# Altium PCB CH549EVT_Core_Pac_L@1809.PcbDoc
Units mil, origin at the board's own origin, x right, y up, seen from the top; angles counter-clockwise.
Board outline 1790.5 x 2155.84 mil, 2 copper layers (Top Layer, Bottom Layer); 16 components, 51 nets, 142 pads, 73 vias.
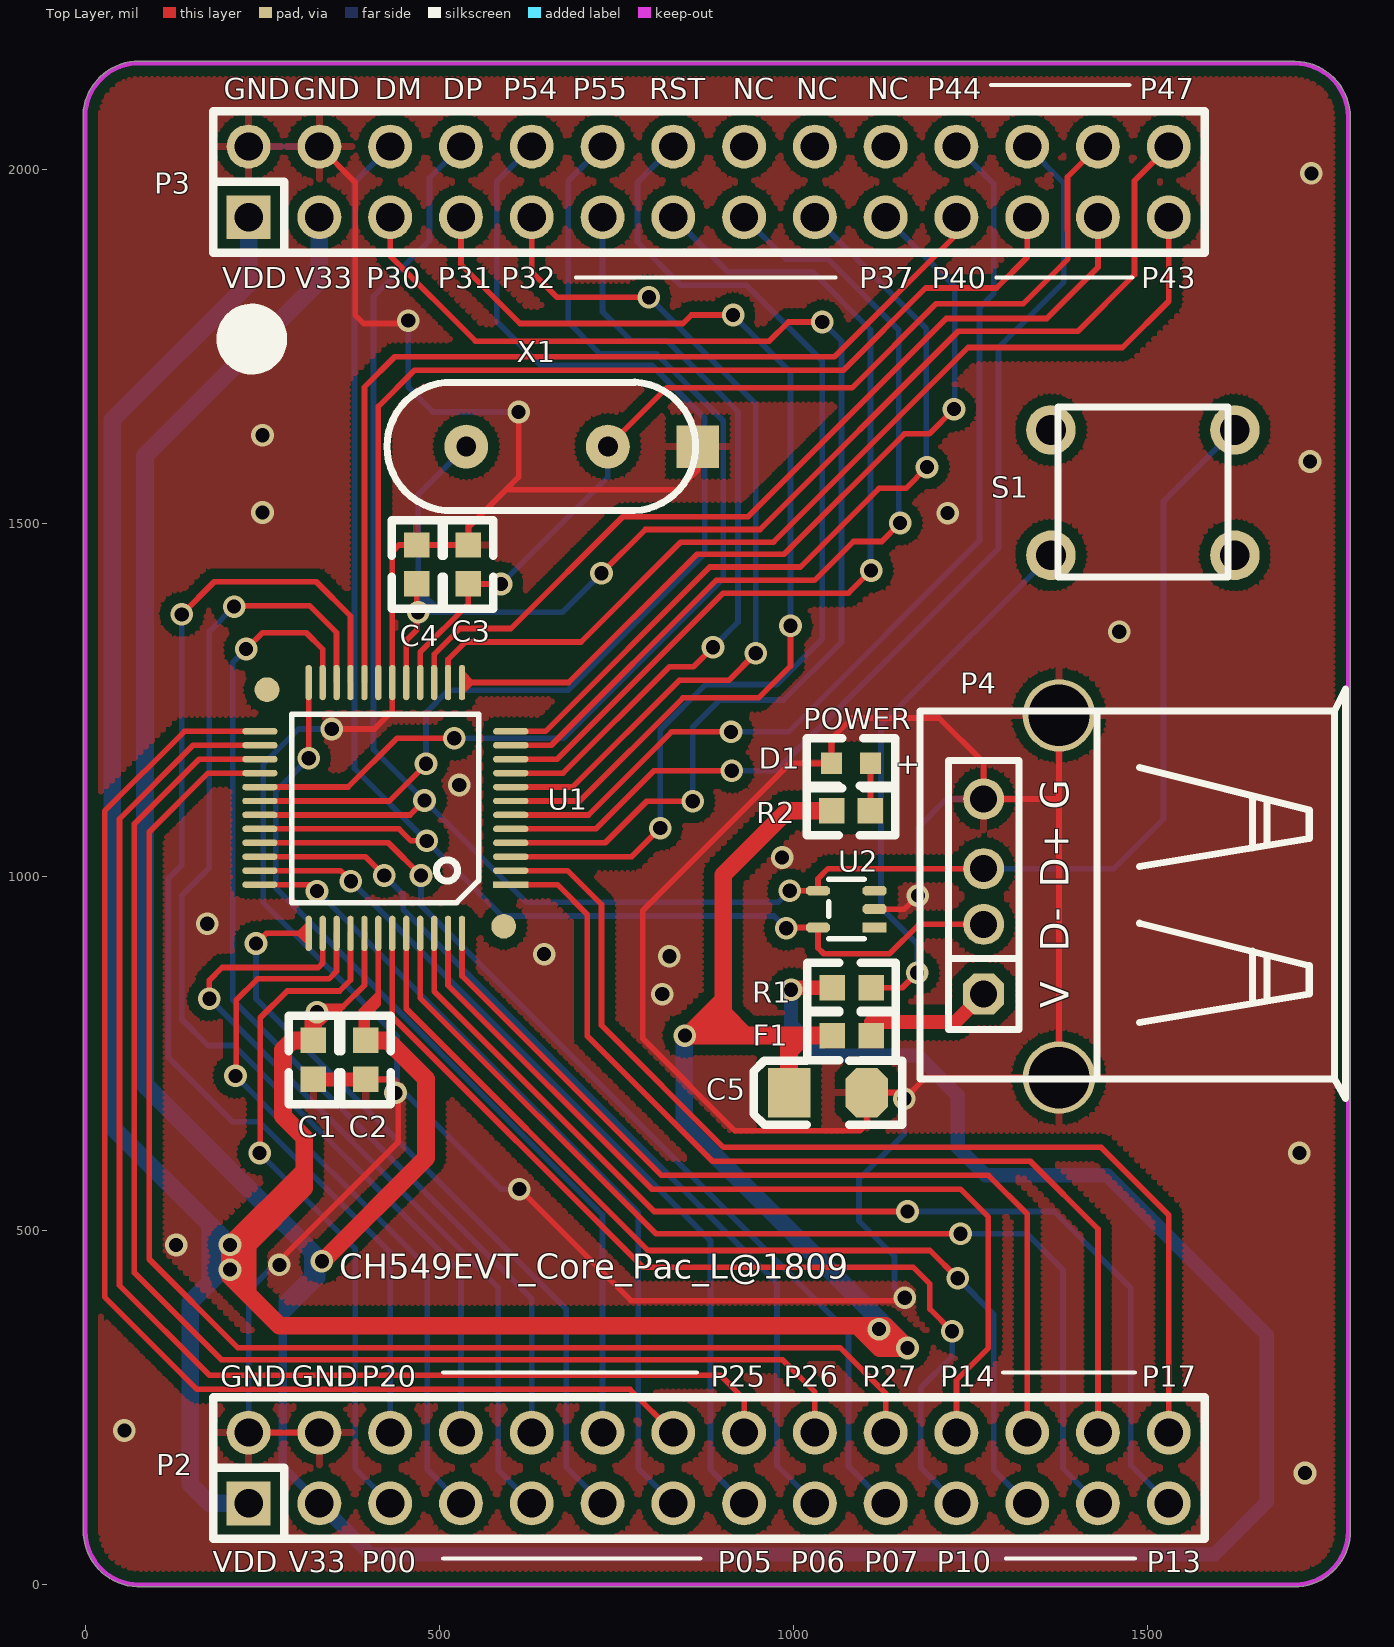
[diagram p0: Top Layer view]
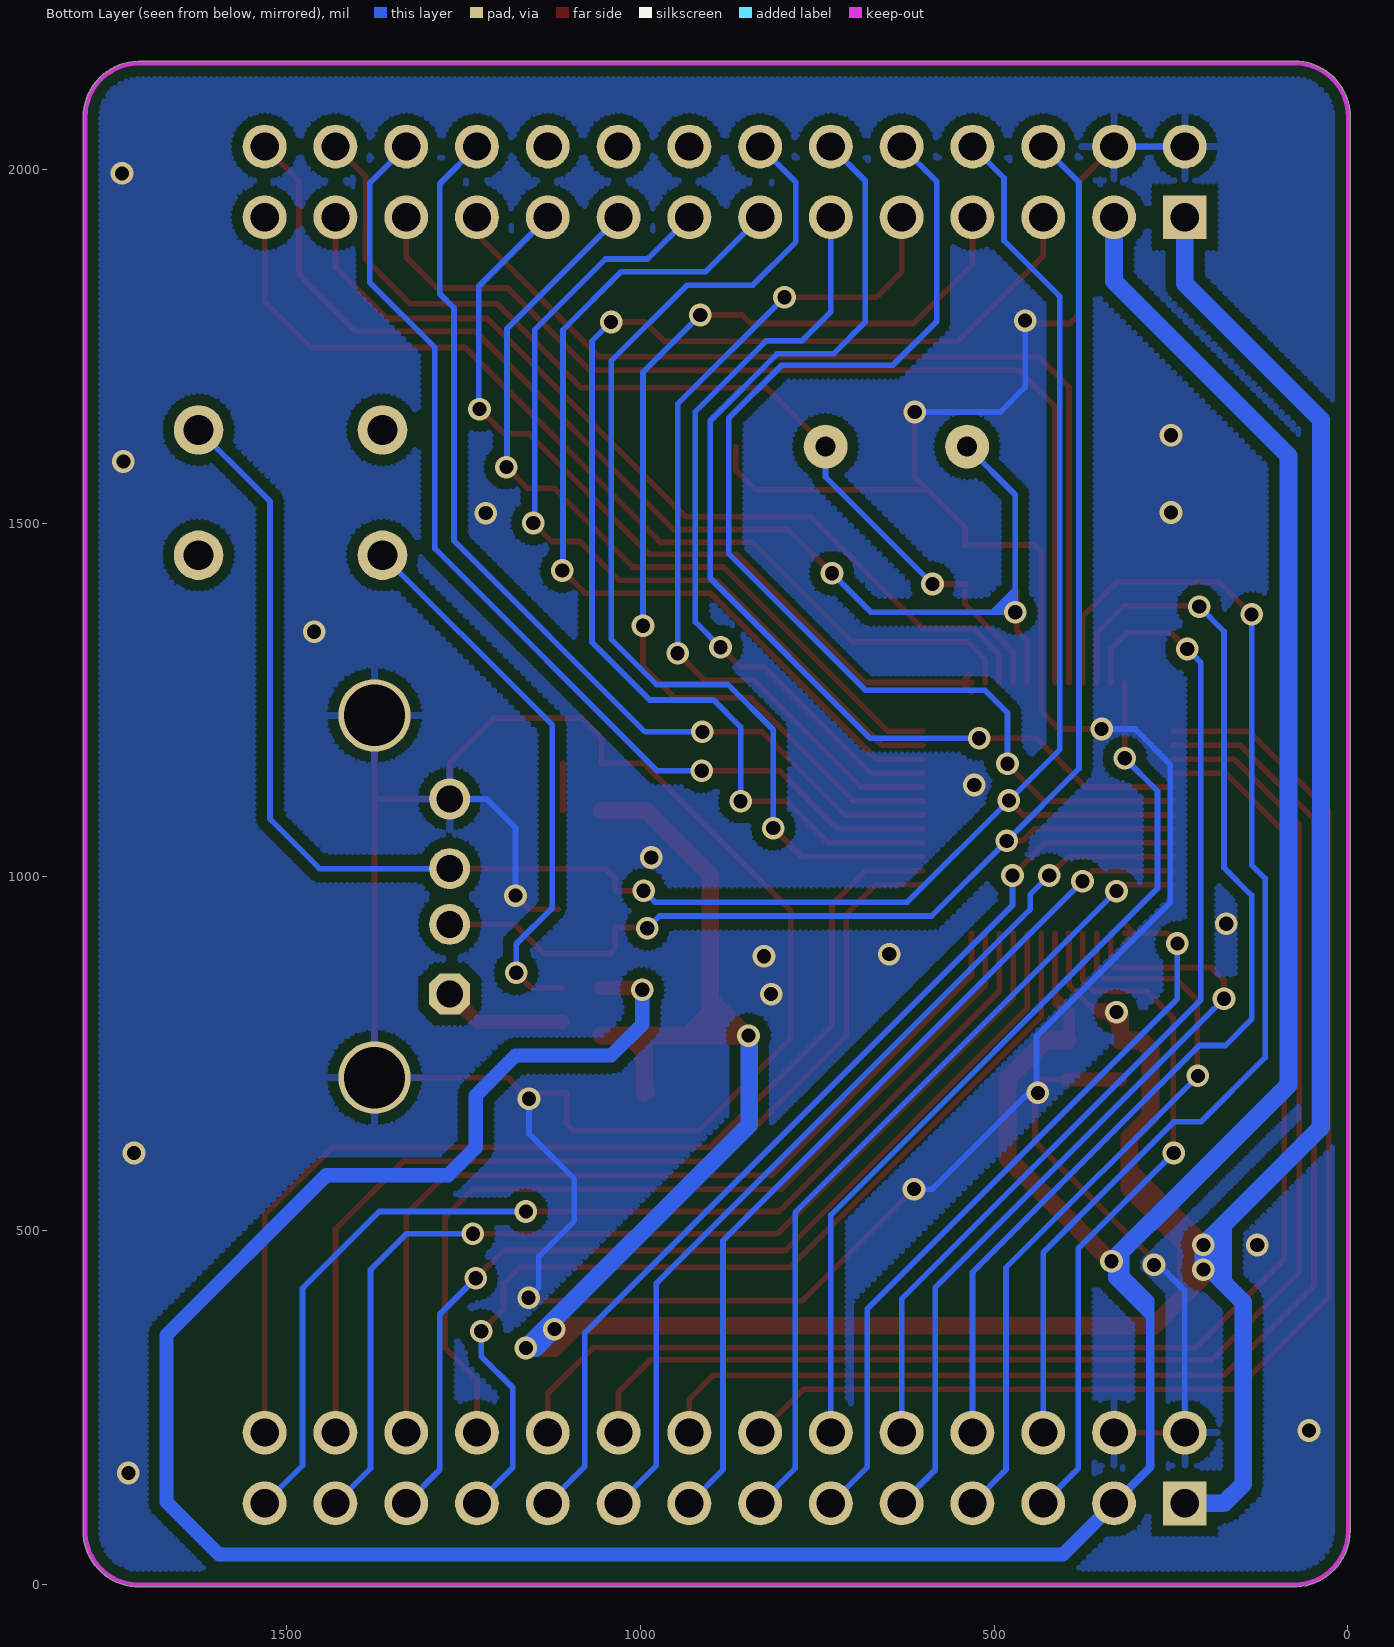
[diagram p1: Bottom Layer view, seen from below]

## Layer stack, top to bottom
Top Layer: signal copper 1.4
Dielectric: dielectric 12.6, FR-4, Dk 4.8
Bottom Layer: signal copper 1.4

## Board outline
-2.94,76.96 -2.94,2071.81 cw(c-0.36,2073.38) -3.37,2073.38 cw(c76,2073.38) -2.94,2081.67 -2.94,2082 cw(c0.08,2082) -2.8,2082.91 cw(c76,2073.38) 76,2152.75 1707.6,2152.75 cw(c1707.6,2149.73) 1708.82,2152.49 cw(c1707.64,2073.13) 1786.67,2080.49 cw(c1784.08,2078.96) 1787.09,2078.96 1787.09,76.74 cw(c1784.11,76.28) 1787.13,76.28 cw(c1707.76,76.28) 1707.76,-3.09 cw(c1707.76,-0.08) 1707.03,-3 cw(c1706.77,0) 1706.77,-3.01 77.04,-3.01 cw(c76.36,-0.08) 76.36,-3.09 cw(c76.36,76.28) 72.78,-3.01 cw(c76.36,76.28) -3.02,76.28 cw(c0,76.28)

## Design rules (kind name [scope] priority, off if disabled: settings)
Clearance Clearance_1 [InPoly] p1: gap=15
Clearance [All] p2: gap=8
ComponentClearance [All] p1: gap=0 collisioncheckmode=3 verticalgap=10 showdistances=FALSE
MinimumSolderMaskSliver [All] p1 off: minsoldermaskwidth=10
PolygonConnect [IsVia] p1: connectstyle=Direct reliefconductorwidth=10 reliefentries=4 polygonreliefangle="90 Angle"
RoutingVias [All] p1: holewidth=12 width=24 viastyle="Through Hole" minholewidth=12 minwidth=24 maxholewidth=28 maxwidth=50
SilkToSilkClearance [All] p1 off: silktosilkclearance=10
SilkscreenOverComponentPads SilkToSolderMaskClearance [IsPad] p1 off: minsilkscreentomaskgap=10
SolderMaskExpansion [All] p1: expansion=4
Width [All] p1: maxlimit=30 minlimit=8 preferedwidth=10
24 further rules are at their usual default settings.

## Classes and differential pairs
component class CH549EVT_Core_Pac_L: C1 C2 C3 C4 D1 F1 P2 P3 P4 R1 R2 U1 U2 X1

## Components (designator, comment, footprint, x,y, rotation, side; value= is the part's Value field where it differs from the comment)
C1 "Cap" 0603 322.08,714 r90 top
C2 "Cap" 0603 396.08,714 r90 top
C3 "(NC 15p)" 0603 541.08,1414 r90 top
C4 "(NC 15p)" 0603 468.11,1414 r90 top
C5 "Cap" 3216 994.08,695.25 r180 top
D1 "LED3" 0603L 1109.08,1160.64 r180 top
F1 "500mA" 0603 1055.08,775.9 r0 top
P2 "Header 14X2" IDC28 230.56,115 r90 top (schematic designator P14)
P3 "Header 14X2" IDC28 230.56,1932 r90 top (schematic designator P15)
P4 "USB" USBA-L 1269.08,834.64 r90 top
R1 "4.7K" 0603 1055.08,843.57 r0 top
R2 "Res2" 0603 1054.08,1093.64 r0 top
S1 "SW-PB" keyx 1623.92,1631.63 r270 top (schematic designator S2)
U1 "CH549L" LQFP48 600.88,989.21 r90 top locked
U2 "CH412Z" SOT353 1115.08,928.57 r90 top
X1 "(NC 24MHz)" XTAL62/28 738.08,1608 r90 top

## Footprints (in the part's own frame and the unit in brackets; to place one, negate y for a bottom-side part, rotate by r counter-clockwise, add the part's x,y. Pads: shape width x height; smd on the part's side, far side on the other; paste and mask are expansions set on the pad)
0603 [mil]
  rect 36x36 smd: 1(0,0) 2(55,0)
  silkscreen extent -35,-35 90,35
0603L [mil]
  rect 30x30 smd: 1(0,0) 2(55,0)
  silkscreen extent -35,-35 90,35
3216 [mil]
  rect 60x70 smd: 1(0,0)
  oct 60x70 smd: 2(-110,0)
  silkscreen extent -160,-45 50,45
IDC28 [mil]
  rect 62x62 hole 40: 1(0,0)
  round 62 hole 40: 2(100,0) 3(0,-100) 4(100,-100) 5(0,-200) 6(100,-200) 7(0,-300) 8(100,-300) 9(0,-400) 10(100,-400) 11(0,-500) 12(100,-500) 13(0,-600) 14(100,-600) 15(0,-700) 16(100,-700) 17(0,-800) 18(100,-800) 19(0,-900) 20(100,-900) 21(0,-1000) 22(100,-1000) 23(0,-1100) 24(100,-1100) 25(0,-1200) 26(100,-1200) 27(0,-1300) 28(100,-1300)
  silkscreen extent -50,-1351 150,50
keyx [mil]
  round 70 hole 42: 1(0,0) 2(0,-259.84) 3(177.17,-259.84) 4(177.17,0)
  silkscreen extent -32,-250 208,-10
LQFP48 [mm]
  round 0.889 smd: 0(-1.496,0.254) 0(6.996,8.746)
  rect 0.229x1.27 smd: 1(0,0)
  oval 0.229x1.27 smd: 2(0.5,0) 3(1,0) 4(1.5,0) 5(2,0) 6(2.5,0) 7(3,0) 8(3.5,0) 9(4,0) 10(4.5,0) 11(5,0) 12(5.5,0) 25(5.5,9) 26(5,9) 27(4.5,9) 28(4,9) 29(3.5,9) 30(3,9) 31(2.5,9) 32(2,9) 33(1.5,9) 34(1,9) 35(0.5,9) 36(0,9)
  oval 1.27x0.229 smd: 13(7.25,1.75) 14(7.25,2.25) 15(7.25,2.75) 16(7.25,3.25) 17(7.25,3.75) 18(7.25,4.25) 19(7.25,4.75) 20(7.25,5.25) 21(7.25,5.75) 22(7.25,6.25) 23(7.25,6.75) 24(7.25,7.25) 37(-1.75,7.25) 38(-1.75,6.75) 39(-1.75,6.25) 40(-1.75,5.75) 41(-1.75,5.25) 42(-1.75,4.75) 43(-1.75,4.25) 44(-1.75,3.75) 45(-1.75,3.25) 46(-1.75,2.75) 47(-1.75,2.25) 48(-1.75,1.75)
  silkscreen extent -0.65,1.15 6.11,7.86
SOT353 [mil]
  rect 14x34 smd: 1(0,0)
  oct 14x34 smd: 2(26,0) 3(52,0) 4(52,80) 5(0,80)
  silkscreen extent -16,15 68,65
USBA-L [mm]
  oct 1.473x1.473 hole 0.965: 1(0,0)
  round 1.473 hole 0.965: 2(2.5,0) 3(4.5,0) 4(7,0)
  round 2.6 hole 2.2: 5(-3,-2.7) 6(10,-2.7)
  silkscreen extent -3.75,-12.99 10.95,2.29
XTAL62/28 [mil]
  rect 60x60 smd: 0(0,-127)
  round 62 hole 28: 1(0,0) 2(0,200)
  silkscreen extent -91,-124 91,312

## Part data
C1 C2 C5: "Capacitor"
C3 C4: library part Pro1BB.tmp_20p_7
D1: "Typical BLUE SiC LED"
F1: library part "Fuse 1", "Fuse"
P2 P3: "Header, 14-Pin, Dual row"
P4: "USB Port"
R1: library part Res2, "Resistor"
R2: "Resistor"
S1: "Switch"
U1: "8bit MCS51 MCU with ADC & USB type-C host & device & quad UART & SPI"
U2: "Quad ESD protect, low speed"
X1: library part Pro1BB.tmp_12MHz_6

## Via types
v1: diameter 32, hole 20, Top Layer to Bottom Layer, tented both sides, 73 vias

## Nets (pads, with @x,y where several pads share a name; then routed paths per layer and width w, separated by ;. In a path a pad name is that pad's centre, name@x,y a point inside that pad or via, vN(x,y) a via of type N, cw(c..) or ccw(c..) an arc to the next point about the centre after c; other vN are vias at no path point)
DM: P3.6 P4.2 U1.32 U2.5 | length 2174.8
  Top Layer w8: U1.32 443.13,1067.95 460.08,1051 v1(482.13,1051) ; v1(990.08,927.57) 991.08,928.57 U2.5 1035.08,899.57 1043.08,891.57 1136.08,891.57 1177.57,933.06 P4.2
  Bottom Layer w8: P3.6 380.08,1981.52 380.08,1153.05 v1(482.13,1051) 588.36,944.76 972.89,944.76 v1(990.08,927.57)
DP: P3.8 P4.3 S1.1 U1.31 U2.4 | length 3021.7
  Top Layer w8: U1.31 458.72,1087.64 v1@475.08,1104 ; v1(995.08,980.57) U2.4 1035.08,997.57 1049.31,1011.8 P4.3
  Bottom Layer w8: P3.8 486.08,1987.52 486.08,1899 407.08,1820 407.08,1180 v1(479.08,1108) 622.63,964.45 978.95,964.45 v1(995.08,980.57) ; P4.3 1452.94,1011.8 1523.08,1081.94 1523.08,1530.79 S1.1@1643.61,1651.31
GND: C1.1 C2.1 C3.2 C4.2 C5.2 D1.2 P2.2 P2.4 P3.2 P3.4 P4.4 P4.5 P4.6 U1.18 U2.2 X1.0 | length 6788.2
  Top Layer w8: P2.2 P2.4 ; v1@271.08,456 272.08,456 442.08,626 442.08,704 432.08,714 C2.1 ; P3.4 381.08,1981.48 381.08,1794 393.08,1782 v1@467.08,1782 ; v1@351.08,1209 408.08,1209 433.56,1234.48 U1.18 433.56,1459.48 443.08,1469 C4.2 C3.2 541.08,1494 594.08,1547 ; v1(612.08,1657) 612.08,1565 594.08,1547 ; v1(613.08,559) 770.62,401.46 1141.81,401.46 v1@1157.56,417.2 ; X1.0 865.08,1575 837.08,1547 594.08,1547 ; U2.2 1157.08,954.57 v1(1176.08,973.57) ; P4.6 1375.38,1110.12 ; 1375.38,1110.12 1375.27,1110.23 P4.4 1269.08,1161.57 1206.08,1224.57 1083.08,1224.57 1054.08,1195.57 D1.2 995.48,1160.64 787.48,952.64 787.48,771.54 917.76,641.25 1094.2,641.25 1104.08,651.13 C5.2 1148.4,695.25 v1(1157.08,686.57) 1187.03,716.53 P4.5 1375.38,1110.12
  Top Layer w20: C1.1 C2.1
  Bottom Layer w8: P2.2 230.56,415.48 v1@271.08,456 ; P3.2 P3.4 ; v1@351.08,1209 301.08,1209 251.08,1159 251.08,964 440.08,775 v1@440.08,702 ; v1@442.08,704 587.08,559 v1(613.08,559) ; v1(456.08,1786) 456.08,1692 491.08,1657 v1(612.08,1657) ; v1(1157.08,686.57) 1157.08,637.2 1093.01,573.13 1093.01,514.07 1143.08,464 1143.08,419.87 v1(1157.56,405.39) ; v1(1176.08,973.57) 1176.08,1069.57 1216.73,1110.23 P4.4
  other v1: 1723.08,158 55.08,218 274.08,452 128.08,480 1715.08,610 438.08,695 815.04,834.53 825.08,888 648.08,891 172.08,934 984.33,1027.44 528.08,1130 348.08,1209 1460.71,1346.34 1218.08,1514 250.08,1515 1730.08,1587 250.08,1624 1732.08,1994
NetD1_1: D1.1 R2.2 | length 67
  Top Layer w8: R2.2 D1.1
NetF1_2: F1.2 P4.1 | length 175.8
  Top Layer w20: 1110.34,794.64 1110.08,794.9 1229.34,794.9 P4.1
NetP1_2: R1.2 S1.3 | length 812
  Top Layer w8: R1.2 1154.08,843.57 v1(1175.08,864.57)
  Bottom Layer w8: v1(1175.08,864.57) 1175.08,905.57 1124.08,956.57 1124.08,1214.46 S1.3@1383.76,1474.15
P00: P2.5 U1.40 | length 978.3
  Top Layer w8: v1(246.08,610) 247.08,611 247.08,801 285.08,839 359.08,839 374.5,854.43 U1.40
  Bottom Layer w8: v1(246.08,610) 381.08,475 381.08,164.48 P2.5
P01: P2.7 U1.39 | length 1055.1
  Top Layer w8: v1@213.08,719 213.08,826 243.08,856 344.08,856 354.82,866.74 U1.39
  Bottom Layer w8: v1(212.08,719) 483.08,448 483.08,162.48 P2.7
P02: P2.9 U1.38 | length 1139.9
  Top Layer w8: v1(175.08,828) 175.08,843 175.08,854 193.08,872 204.08,872 329.08,872 335.13,878.06 U1.38
  Bottom Layer w8: v1(175.08,828) 583.08,420 583.08,162.48 P2.9
P03: P2.11 U1.37 | length 1109.4
  Top Layer w8: v1(241.08,906) 255.39,920.31 284.08,920.31 302.08,920.31 ; U1.37@313.92,932.16 302.08,920.31 ; U1.37@315.24,907.16 302.08,920.31 ; U1.37 302.08,920.31
  Bottom Layer w8: v1(241.08,906) 241.08,828 679.08,390 679.08,166.48 P2.11
P04: P2.13 U1.36 | length 1157.9
  Top Layer w8: U1.36 317.87,989.21 v1(327.08,980)
  Bottom Layer w8: v1(327.08,980) 781.08,526 781.08,508 781.08,164.48 P2.13
P05: P2.15 U1.35 | length 1243.8
  Top Layer w8: U1.35 360.18,1008.9 v1(375.08,994)
  Bottom Layer w8: v1(375.08,994) 883.08,486 883.08,478 883.08,162.48 P2.15
P06: P2.17 U1.34 | length 1351.5
  Top Layer w8: U1.34 395.5,1028.58 v1(422.08,1002)
  Bottom Layer w8: v1@410.08,1005 422.08,993 v1(422.08,1002) 449.08,975 449.08,954 977.08,426 977.08,168.48 P2.17
P07: P2.19 U1.33 | length 1405.6
  Top Layer w8: U1.33 427.81,1048.27 v1(474.08,1002)
  Bottom Layer w8: v1(474.08,1002) 474.08,960 1078.08,356 1078.08,167.48 P2.19
P10: P2.21 U1.43 | length 1396
  Top Layer w8: U1.43 433.56,802.52 787.38,448.7 1169.37,448.7 1192.99,425.08 1192.99,389.65 v1(1224.49,358.15)
  Bottom Layer w8: v1(1224.49,358.15) 1224.49,322.72 1180.08,278.31 1180.08,165.48 P2.21
P11: P2.23 U1.44 | length 1402
  Top Layer w8: U1.44 453.24,813.83 794.76,472.32 1192.99,472.32 v1(1232.36,432.95)
  Bottom Layer w8: v1(1232.36,432.95) 1283.08,382.24 1283.08,162.48 P2.23
P12: P2.25 U1.45 | length 1520.7
  Top Layer w8: U1.45 472.93,829.15 806.13,495.94 v1(1236.3,495.94)
  Bottom Layer w8: v1@1224.49,495.94 v1(1236.3,495.94) 1330.13,495.94 1381.08,445 1381.08,164.48 P2.25
P13: P2.27 U1.46 | length 1566.2
  Top Layer w8: U1.46 492.61,838.46 803.64,527.44 v1(1161.5,527.44)
  Bottom Layer w8: v1(1161.5,527.44) 1368.64,527.44 1477.08,419 1477.08,168.48 P2.27
P14: P2.22 U1.47 | length 1295.7
  Top Layer w8: U1.47 512.3,846.78 800.14,558.94 1236.3,558.94 1275.67,519.57 1275.67,334.53 1230.56,289.42 P2.22
P15: P2.24 U1.48 | length 1306.9
  Top Layer w8: U1.48 531.98,860.09 813.71,578.37 1275.92,578.37 1330.56,523.73 P2.24
P16: P2.26 U1.1 | length 1419.5
  Top Layer w8: U1.1 666.87,989.21 709.08,947 709.08,775.13 885.9,598.31 1334.77,598.31 1430.56,502.52 P2.26
P17: P2.28 U1.2 | length 1538.5
  Top Layer w8: U1.2 681.18,1008.9 729.08,961 729.08,790.57 901.65,617.99 1435.09,617.99 1530.56,522.52 P2.28
P20: P2.6 U1.21 | length 1687.4
  Top Layer w8: v1(136.08,1371) 182.08,1417 326.08,1417 374.5,1368.57 U1.21
  Bottom Layer w8: v1(136.08,1371) 136.08,1017 117.08,998 117.08,745 208.08,654 246.08,654 430.56,469.52 P2.6
P21: P2.8 U1.22 | length 1615.5
  Top Layer w8: v1(210.08,1382) 211.08,1383 317.08,1383 354.82,1345.26 U1.22
  Bottom Layer w8: v1@211.08,1383 v1(210.08,1382) 175.08,1347 175.08,1013 136.08,974 136.08,799 173.08,762 210.08,762 530.56,441.52 P2.8
P22: P2.10 U1.23 | length 1464.3
  Top Layer w8: v1(227.08,1322) 250.08,1345 312.08,1345 335.13,1321.94 U1.23
  Bottom Layer w8: v1(227.08,1322) 208.08,1303 208.08,826 630.56,403.52 P2.10
P23: P2.12 U1.24 | length 1270
  Top Layer w8: v1(315.45,1167.63) U1.24
  Bottom Layer w8: v1(315.45,1167.63) 269.08,1121.26 269.08,984 730.56,522.52 P2.12
P24: P2.14 U1.25 | length 1835.5
  Top Layer w8: U1.25 139.83,1205.75 27.08,1093 27.08,406.47 157.55,276 769.56,276 P2.14
P25: P2.16 U1.26 | length 1897.1
  Top Layer w8: U1.26 152.14,1186.06 48.08,1082 48.08,423 175.08,296 897.08,296 930.56,262.52 P2.16
P26: P2.18 U1.27 | length 1938.1
  Top Layer w8: U1.27 160.46,1166.38 69.08,1075 69.08,441 192.08,318 985.08,318 1030.56,272.52 P2.18
P27: P2.20 U1.28 | length 1969
  Top Layer w8: U1.28 173.08,1146.69 90.08,1063.69 90.08,460 215.08,335 1066.08,335 1130.56,270.52 P2.20
P30: P3.5 U1.4 | length 1835.7
  Top Layer w8: P3.5 430.56,1877.52 551.08,1757 966.08,1757 993.08,1784 v1(1041.08,1784) ; U1.4 734.35,1048.27 793.08,1107 v1(858.08,1107)
  Bottom Layer w8: v1(858.08,1107) 858.08,1212 896.08,1250 986.42,1250 1068.08,1331.66 1068.08,1757 v1(1041.08,1784)
P31: P3.7 U1.7 | length 1494.3
  Top Layer w8: P3.7 530.56,1865.52 614.08,1782 844.08,1782 856.08,1794 v1(915.08,1794) ; U1.7 698.4,1107.32 844.08,1253 951.08,1253 996.08,1298 v1(996.08,1355)
  Bottom Layer w8: v1(915.08,1794) 996.08,1713 v1(996.08,1355)
P32: P3.9 U1.8 | length 1247.7
  Top Layer w8: U1.8 688.09,1127.01 839.08,1278 909.08,1278 v1(947.08,1316) ; P3.9 630.56,1854.63 666.19,1819 v1(796.08,1819)
  Bottom Layer w8: v1(796.08,1819) 947.08,1668 v1(947.08,1316)
P33: P3.11 U1.9 | length 1090.4
  Top Layer w8: U1.9 674.77,1146.69 825.08,1297 859.08,1297 v1(886.58,1324.5)
  Bottom Layer w8: P3.11 730.56,1798.52 771.71,1757.37 822.08,1757.37 922.08,1657.37 922.08,1360 v1(886.58,1324.5)
P34: P3.13 U1.10 | length 1304.4
  Top Layer w8: U1.10 666.46,1166.38 901.08,1401 1078.08,1401 v1(1110.08,1433)
  Bottom Layer w8: P3.13 907.56,1855 1027.08,1855 1109.08,1773 1109.08,1434 v1(1110.08,1433)
P35: P3.15 U1.11 | length 1239.6
  Top Layer w8: U1.11 658.14,1186.06 891.08,1419 1030.08,1419 1085.08,1474 1125.08,1474 v1(1151.08,1500)
  Bottom Layer w8: P3.15@931.68,1932 P3.15 989.56,1873 1049.08,1873 1149.08,1773 1149.08,1502 v1(1151.08,1500)
P36: P3.17 U1.12 | length 1161.5
  Top Layer w8: U1.12 649.83,1205.75 882.08,1438 1010.08,1438 1121.08,1549 1159.08,1549 v1(1189.08,1579)
  Bottom Layer w8: P3.17 1188.08,1774.48 1188.08,1580 v1(1189.08,1579)
P37: P3.19 U1.13 | length 1203.1
  Top Layer w8: U1.13@531.93,1261.15 545.43,1274.65 ; U1.13 545.43,1274.65 ; U1.13@533.08,1287 545.43,1274.65 ; v1(1227.08,1661) 1192.08,1626 1157.08,1626 987.08,1456 864.08,1456 682.72,1274.65 545.43,1274.65
  Bottom Layer w8: P3.19 1228.08,1834.48 v1@1228.08,1661
P40: P3.21 U1.20 | length 1367.6
  Top Layer w8: U1.20 394.19,1692.11 437.08,1735 1058.08,1735 1230.56,1907.48 P3.21
P41: P3.23 U1.19 | length 1450.6
  Top Layer w8: U1.19 413.87,1664.8 465.08,1716 1071.08,1716 1187.08,1832 1287.08,1832 1330.56,1875.48 P3.23
P42: P3.25 U1.15 | length 1274.9
  Top Layer w8: U1.15 492.61,1314.54 529.08,1351 601.08,1351 759.08,1509 936.08,1509 1216.08,1789 1358.08,1789 1430.56,1861.48 P3.25
P43: P3.27 U1.14 | length 1379.1
  Top Layer w8: U1.14 512.3,1307.22 537.08,1332 700.08,1332 841.08,1473 972.08,1473 1247.08,1748 1465.08,1748 1530.56,1813.48 P3.27
P44: P3.22 U1.6 | length 1409.7
  Top Layer w8: U1.6 710.72,1087.64 828.08,1205 v1(912.08,1205)
  Bottom Layer w8: v1(912.08,1205) 993.08,1205 1263.08,1475 1263.08,1804 1283.08,1824 1283.08,1979.48 P3.22
P45: P3.24 U1.5 | length 1480.7
  Top Layer w8: U1.5 721.03,1067.95 803.08,1150 v1(913.08,1150)
  Bottom Layer w8: v1(913.08,1150) 976.08,1150 1290.08,1464 1290.08,1748 1382.08,1840 1382.08,1980.48 P3.24
P46: C3.1 P3.26 U1.16 X1.1 | length 1396.9
  Top Layer w8: U1.16 472.93,1317.48 541.08,1385.63 C3.1@541.08,1404 ; C3.1 v1(587.08,1414) ; X1.1 821.08,1691 1083.08,1691 1202.08,1810 1325.08,1810 1388.08,1873 1388.08,1913.15 1387.56,1913.67 1387.56,1989 P3.26
  Bottom Layer w8: v1(587.08,1414) 738.08,1565 X1.1
P47: C4.1 P3.28 U1.17 X1.2 | length 1968.6
  Top Layer w8: U1.17 453.24,1334.17 468.11,1349.03 C4.1@468.11,1404 ; v1(729.08,1429) 791.08,1491 ; 836.08,1491 791.08,1491 ; P3.28 1482.08,1983.52 1482.08,1851 1402.08,1771 1233.08,1771 953.08,1491 791.08,1491
  Bottom Layer w8: 530.08,1374 518.08,1374 ; X1.2 470.08,1540 470.08,1406 ; v1(729.08,1429) 674.08,1374 518.08,1374 ; 470.08,1390 486.08,1374 ; 470.08,1390 470.08,1399 ; 470.08,1390 v1(470.08,1374) 486.08,1374 ; 470.08,1399 470.08,1406 ; 470.08,1399 495.08,1374 ; 470.08,1406 502.08,1374 ; 486.08,1374 495.08,1374 ; 495.08,1374 502.08,1374 ; 502.08,1374 518.08,1374
P54: P3.10 U1.30 | length 1625.4
  Top Layer w8: U1.30 429.4,1107.32 481.08,1159 v1(481.08,1160)
  Bottom Layer w8: v1(481.08,1160) 481.08,1232 513.08,1264 682.08,1264 875.08,1457 875.08,1648 800.08,1723 643.08,1723 581.08,1785 581.08,1982.52 P3.10
P55: P3.12 U1.29 | length 1544.2
  Top Layer w8: U1.29 371.09,1127.01 440.08,1196 v1(521.08,1196)
  Bottom Layer w8: v1(521.08,1196) 675.08,1196 901.08,1422 901.08,1644.63 806.71,1739 727.08,1739 682.08,1784 682.08,1983.52 P3.12
RST: P3.14 U1.3 | length 1528.4
  Top Layer w8: U1.3 771.66,1028.58 v1(812.08,1069)
  Bottom Layer w8: v1(812.08,1069) 812.08,1208 876.08,1272 976.92,1272 1041.08,1336.16 1041.08,1729 934.08,1836 841.08,1836 780.08,1897 780.08,1981.52 P3.14
V33: C2.2 P2.3 P3.3 R1.1 U1.42 | length 5668.6
  Top Layer w8: v1(334.08,457) v1@335.08,457 ; U1.42 413.87,834.94 ; C2.2 389.84,775.24 389.84,810.91 397.72,818.78 ; C2.2 396.08,803.03 ; C2.2 397.72,770.64 397.72,804.67 ; 396.08,803.03 396.08,809 397.72,810.64 ; 396.08,803.03 397.72,804.67 ; 397.72,804.67 397.72,810.64 ; 397.72,804.67 413.87,820.83 413.87,826.8 ; 397.72,810.64 397.72,818.78 ; 397.72,810.64 413.87,826.8 ; 397.72,818.78 413.87,834.94 ; 413.87,826.8 413.87,834.94
  Top Layer w20: v1(997.08,840.57) 1000.08,843.57 R1.1
  Top Layer w25: v1@335.08,457 481.08,603 481.08,715 427.08,769 C2.2
  Bottom Layer w12: 317.08,474 314.58,471.5 314.58,437.5 ; P2.3 279.08,166.48 279.08,378 ; v1@333.08,457 v1@333.08,456 ; v1(334.08,457) v1@333.08,456 ; 279.08,378 279.08,390 ; 279.08,378 333.08,432 v1@333.08,444 ; 279.08,390 v1@333.08,444 ; 279.08,390 279.08,402 314.58,437.5 ; 314.58,437.5 v1@333.08,456 ; v1@333.08,444 v1@333.08,456
  Bottom Layer w20: P2.3 402.56,43 1595.08,43 1669.08,117 1669.08,353 1443.46,578.62 1271.73,578.62 1232.36,617.99 1232.36,691.29 1176.08,747.57 1041.08,747.57 997.08,791.57 v1(997.08,840.57)
  Bottom Layer w25: P3.3 330.56,1841.48 84.08,1595 84.08,706 279.08,511 280.08,511 317.08,474 333.08,458 333.08,457 v1(334.08,457)
VDD: C1.2 C5.1 F1.1 P2.1 P3.1 R2.1 U1.41 | length 5797.4
  Top Layer w8: C1.2@320.08,771 C1.2 322.08,783 343.08,804 ; v1@322.08,799 v1@332.08,809 ; U1.41 394.19,847.11 364.08,817 ; v1@332.08,809 v1(327.08,809) 335.08,817 364.08,817 ; v1@332.08,809 348.08,809 ; 343.08,804 351.08,804 356.08,809 ; 343.08,804 348.08,809 ; 348.08,809 356.08,809 ; 356.08,809 364.08,817
  Top Layer w25: C1.2 292.08,769 279.08,756 279.08,662 309.08,632 309.08,585 ; C1.2@322.08,783 322.08,799 322.08,804 v1(327.08,809) ; C5.1@991.76,697.57 C5.1 994.08,753.9 ; R2.1 991.47,1093.64 901.08,1003.24 901.08,826.65 ; F1.1 1016.08,775.9 ; v1@204.33,455.25 v1(204.33,480.25) 309.08,585 ; v1@204.33,455.25 v1(204.33,445.25) 204.33,435.75 229.08,411 ; v1@204.33,455.25 229.08,480 ; v1@204.33,455.25 229.08,430.5 ; 229.08,411 229.08,430.5 ; 229.08,411 274.08,366 1090.65,366 ; 229.08,430.5 229.08,480 ; 229.08,480 309.08,560 309.08,585 ; v1@850.32,775.9 849.9,775.47 846.53,775.47 v1(846.96,775.9) v1@850.32,775.9 ; v1@850.32,775.9 901.08,826.65 ; v1@850.32,775.9 881.97,775.9 ; 881.97,775.9 901.08,795.01 901.08,807.97 ; 881.97,775.9 933.15,775.9 ; 901.08,807.97 933.15,775.9 ; 901.08,807.97 901.08,826.65 ; 933.15,775.9 994.08,775.9 ; 994.08,753.9 994.08,775.9 ; 994.08,753.9 1016.08,775.9 ; 994.08,775.9 1016.08,775.9 ; 1090.65,366 1130.02,366 1145.05,350.97 ; 1090.65,366 1112.37,344.29 ; 1112.37,344.29 1122.12,334.53 v1(1161.5,334.53) 1145.05,350.97 ; 1112.37,344.29 1119.05,350.97 1145.05,350.97
  Bottom Layer w25: P2.1 175.08,115 148.08,142 148.08,399 176.33,427.25 ; P3.1 230.56,1838.48 38.08,1646 38.08,646.5 176.33,508.25 ; v1@846.08,775.9 846.08,649.94 v1(1161.5,334.53) 1147.81,334.53 v1(1121.19,361.15) ; 176.33,427.25 v1@204.33,455.25 ; 176.33,427.25 176.33,483.25 ; 176.33,483.25 176.33,508.25 ; 176.33,483.25 v1@204.33,455.25 ; 176.33,508.25 v1(204.33,480.25) v1@204.33,455.25
pads on no net: P3.16 P3.18 P3.20 S1.2 S1.4 U1.0 U2.1 U2.3

## Polygon pours and split planes (outlines as drawn)
GND on Top Layer "Top Layer-No Net" (hatched 90Degree grid 8 track 8, remove dead copper, pour order 2): -8.35,2146.76 -0.35,2154.76 1784.65,2154.76 1784.65,-13.24 1785.65,-14.24 1784.65,-15.24 -10.35,-15.24
GND on Bottom Layer "Top Layer-No Net" (hatched 90Degree grid 8 track 8, remove dead copper, pour order 4): 1.72,2159.32 1783.72,2159.32 1784.72,2158.32 1788.72,2154.32 1788.72,-0.68 5.72,-0.68 1.72,3.32

## Keep-outs
Keep-Out Layer:
  lines w6: -0.36,2073.38 cw(c76,2073.38) 76,2149.73 1707.6,2149.73 ; -0.08,76.41 ccw(c76.28,76.41) 76.28,0.05 ; 0,76.28 ccw(c76.36,76.28) 76.36,-0.08 ; 0,76.41 0,2076.13 ; 0.08,76.28 0.08,2082 ; 72.83,0.13 1706.69,0.13 ; 72.91,0 1706.77,0 ; 1707.6,2149.48 cw(c1707.64,2073.13) 1784,2073.13 ; 1707.68,0.05 ccw(c1707.68,76.41) 1784.03,76.41 ; 1707.76,-0.08 ccw(c1707.76,76.28) 1784.11,76.28 ; 1784,77.43 1784,2073.08 ; 1784.08,76.28 1784.08,2078.96

## Silkscreen, mask and mechanical layers (free items; w line width, h text height)
Top Overlay:
  circle w50: c235.08,1760 r25
  lines w6: 505.56,37 617.56,37 726.56,37 813.56,37 868.56,37 ; 505.56,300 613.56,300 725.56,300 815.56,300 863.56,300 ; 693.08,1847 765.81,1847 849.06,1847 932.31,1847 1015.56,1847 1059.56,1847 ; 1279.56,2119 1360.56,2119 1440.06,2119 1474.56,2119 ; 1287.08,1847 1358.56,1847 1438.06,1847 1479.08,1847 ; 1296.56,300 1363.56,300 1438.56,300 1482.56,300 ; 1300.56,37 1366.56,37 1442.56,37 1482.56,37
  text "GND" at 195.56,2099 h30
  text "GND" at 294.56,2099 h30
  text "DM" at 408.56,2099 h30
  text "DP" at 504.56,2099 h30
  text "P54" at 590.56,2099 h30
  text "P55" at 688.56,2099 h30
  text "RST" at 796.56,2099 h30
  text "NC" at 914.56,2099 h30
  text "NC" at 1004.56,2099 h30
  text "NC" at 1104.56,2099 h30
  text "P44" at 1189.56,2099 h30
  text "P47" at 1489.56,2099 h30
  text "VDD" at 193.56,1832 h30
  text "V33" at 296.56,1832 h30
  text "P30" at 396.56,1832 h30
  text "P31" at 497.56,1832 h30
  text "P32" at 587.56,1832 h30
  text "P37" at 1093.56,1832 h30
  text "P40" at 1195.56,1832 h30
  text "P43" at 1491.56,1832 h30
  text "POWER" at 1013.83,1208.54 h30
  text "CH549EVT_Core_Pac_L@1809" at 358.57,432 h35
  text "GND" at 190.56,280 h30
  text "GND" at 291.56,280 h30
  text "P20" at 390.56,280 h30
  text "P25" at 883.56,280 h30
  text "P26" at 986.56,280 h30
  text "P27" at 1097.56,280 h30
  text "P14" at 1207.56,280 h30
  text "P17" at 1492.56,280 h30
  text "VDD" at 179.56,18 h30
  text "V33" at 287.56,18 h30
  text "P00" at 390.56,18 h30
  text "P05" at 893.56,18 h30
  text "P06" at 996.56,18 h30
  text "P07" at 1100.56,18 h30
  text "P10" at 1202.56,18 h30
  text "P13" at 1499.56,18 h30

## Text inside footprints (layer, text, board x,y; h text height)
D1: Top Overlay "+" at 1149.08,1175.64 h30 r270
P4: Top Overlay "G" at 1389.08,1094.64 h40 r90; Top Overlay "V" at 1389.08,814.64 h40 r90; Top Overlay "D+" at 1389.08,984.64 h40 r90; Top Overlay "D-" at 1389.08,894.64 h40 r90